# Altium PCB PCB1.PcbDoc
Units mil, origin at the board's own origin, x right, y up, seen from the top; angles counter-clockwise.
Board outline 3946.22 x 3225 mil, 2 copper layers (Top Layer, Bottom Layer); 38 components, 44 nets, 168 pads, 112 vias.
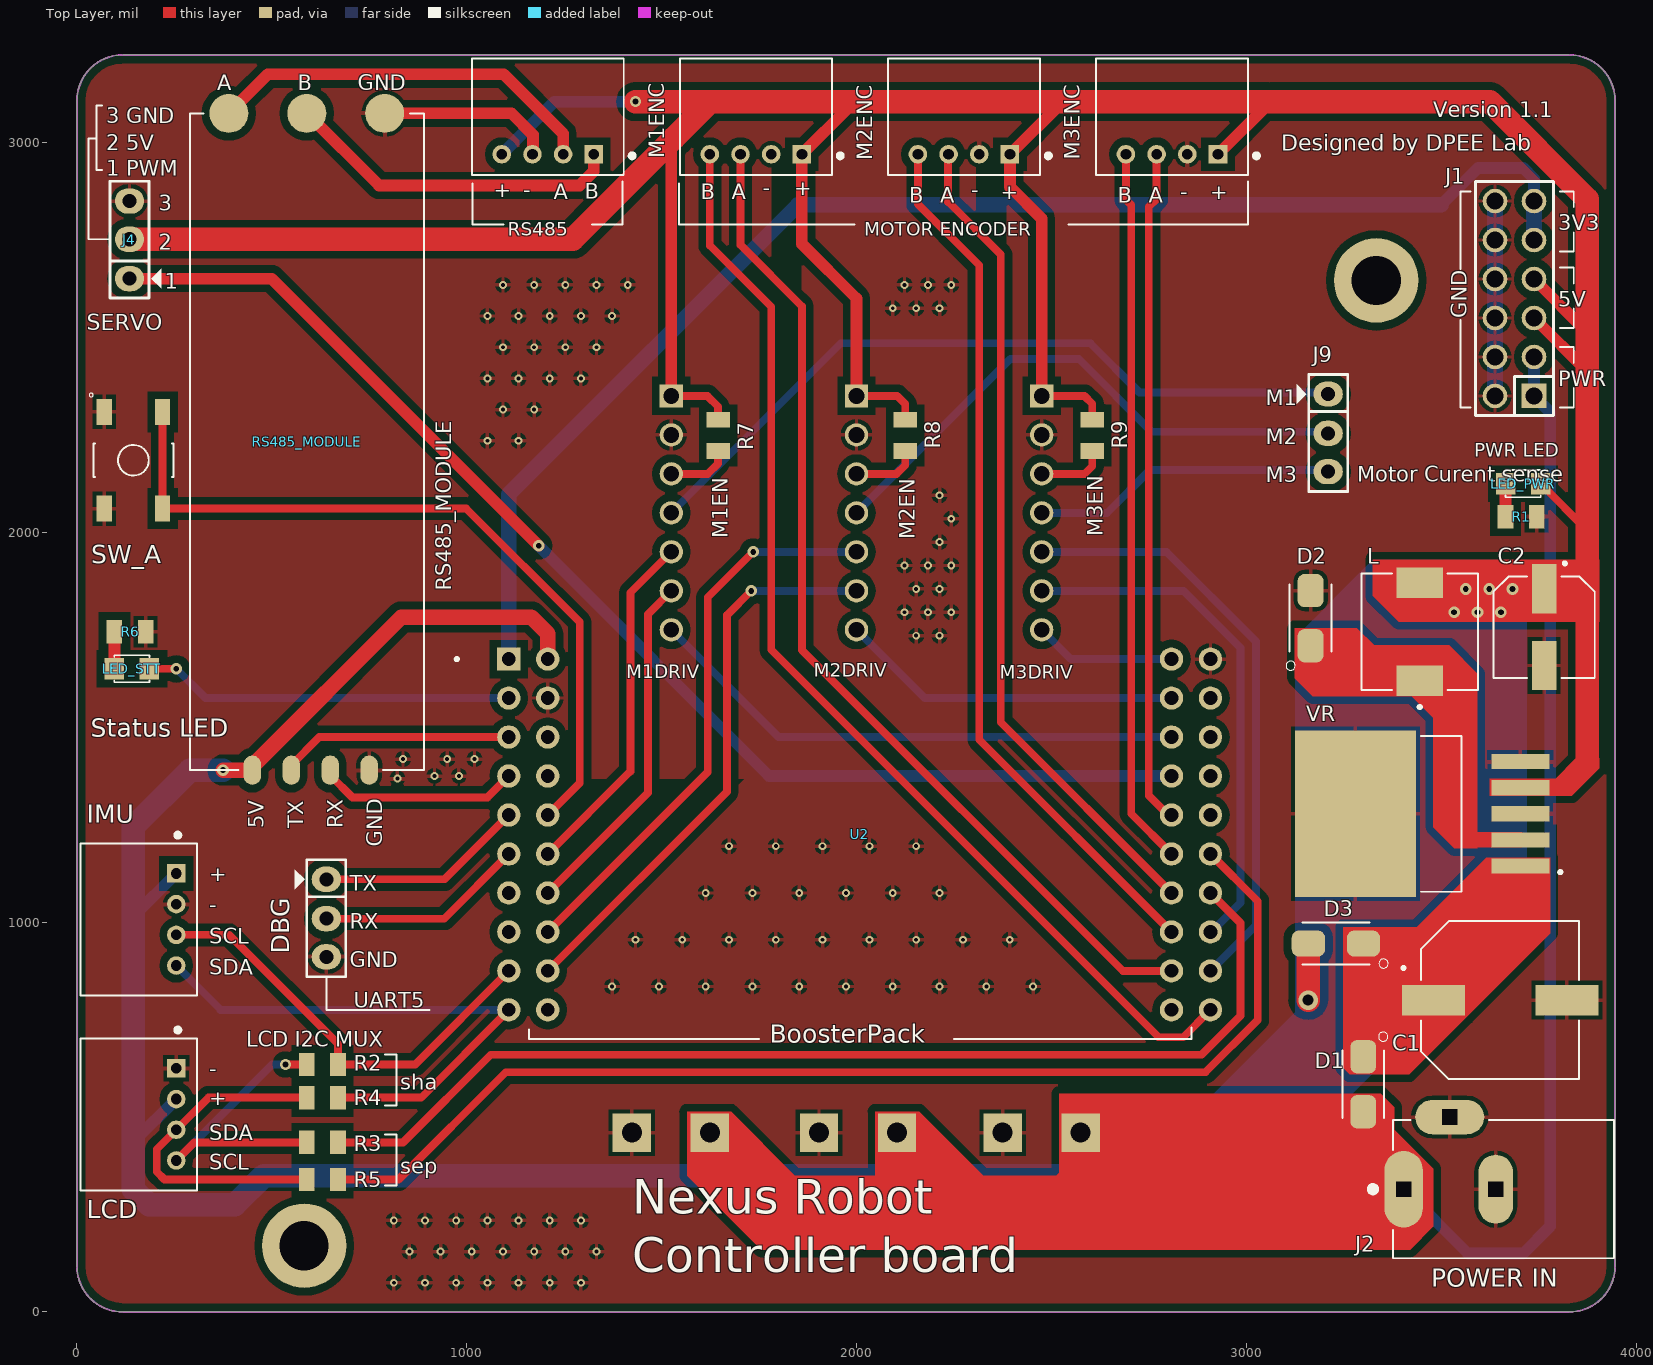
[diagram p0: Top Layer view]
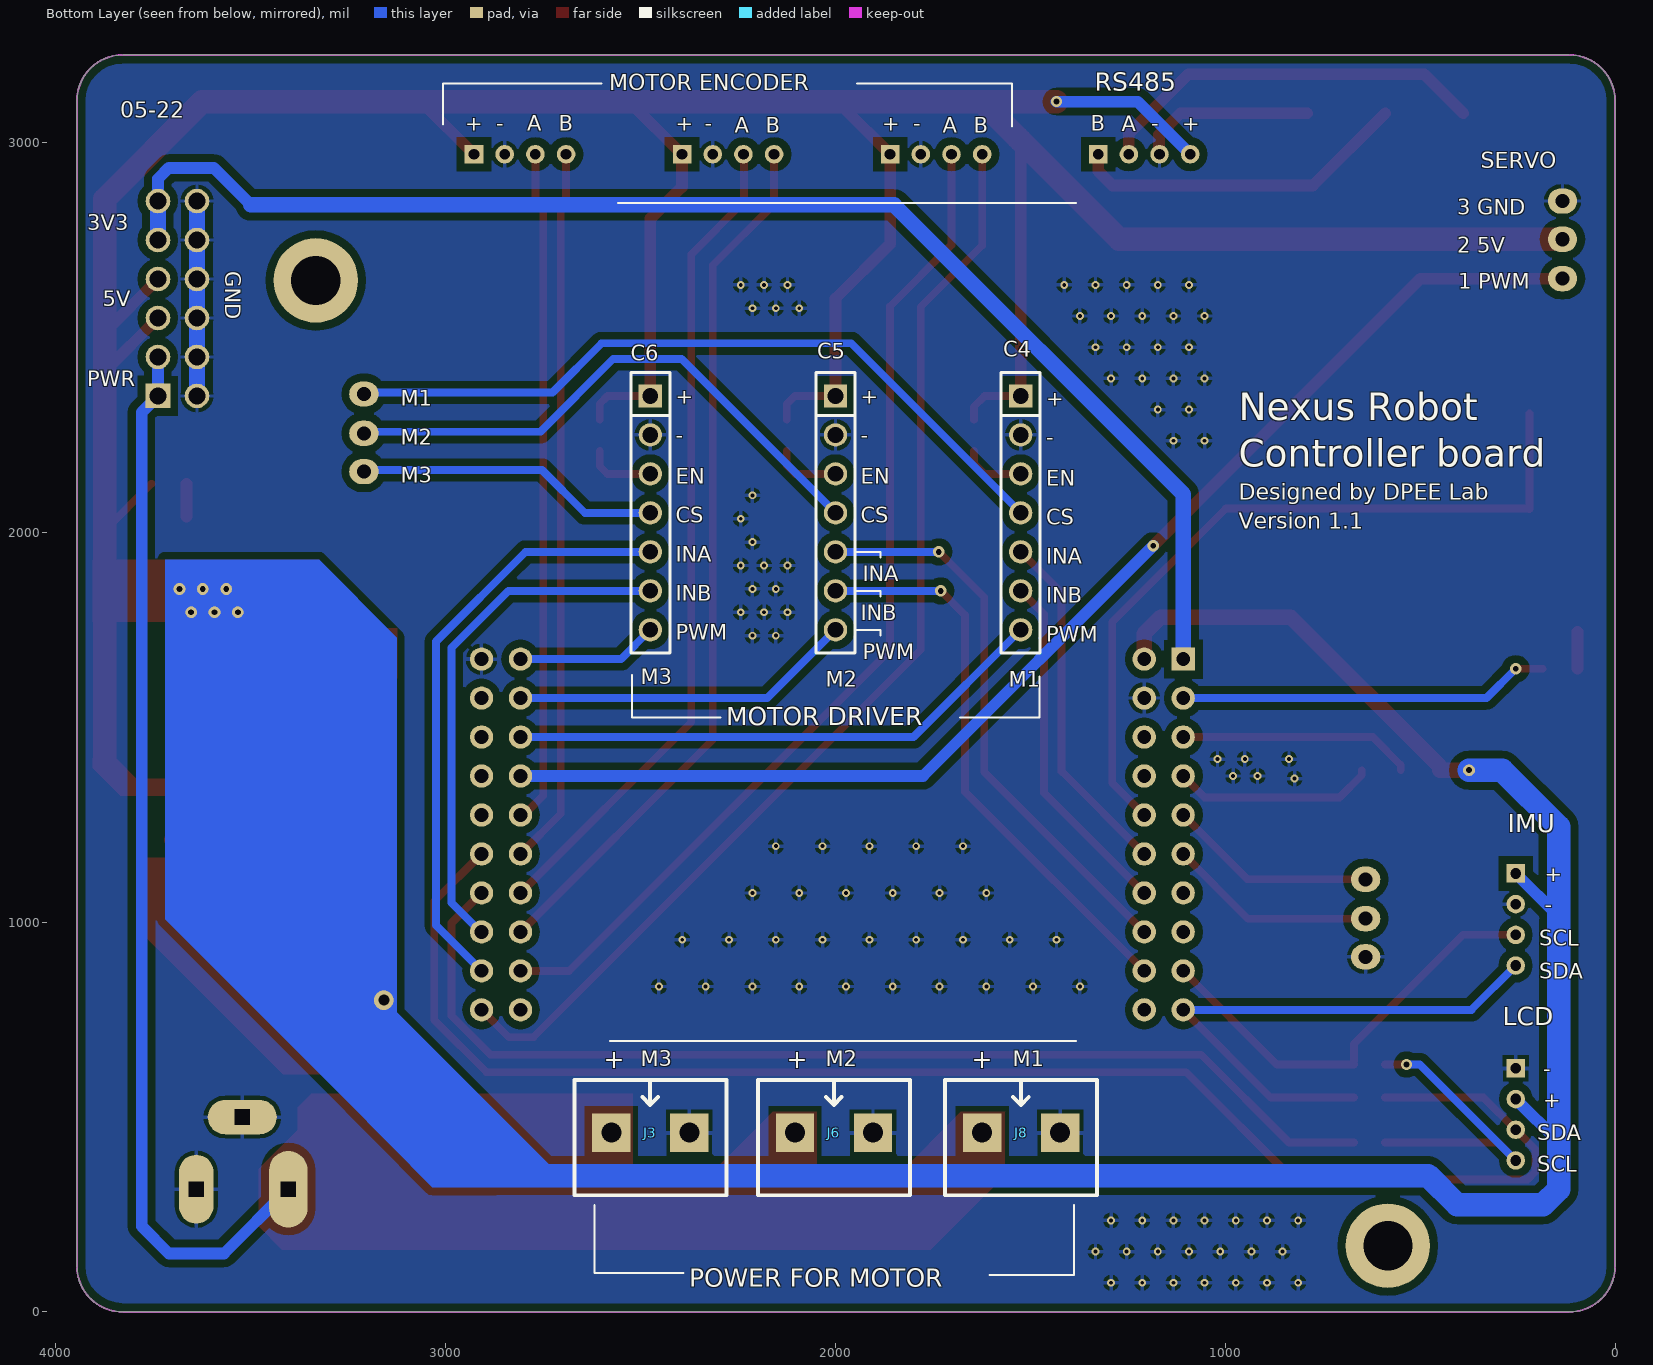
[diagram p1: Bottom Layer view, seen from below]
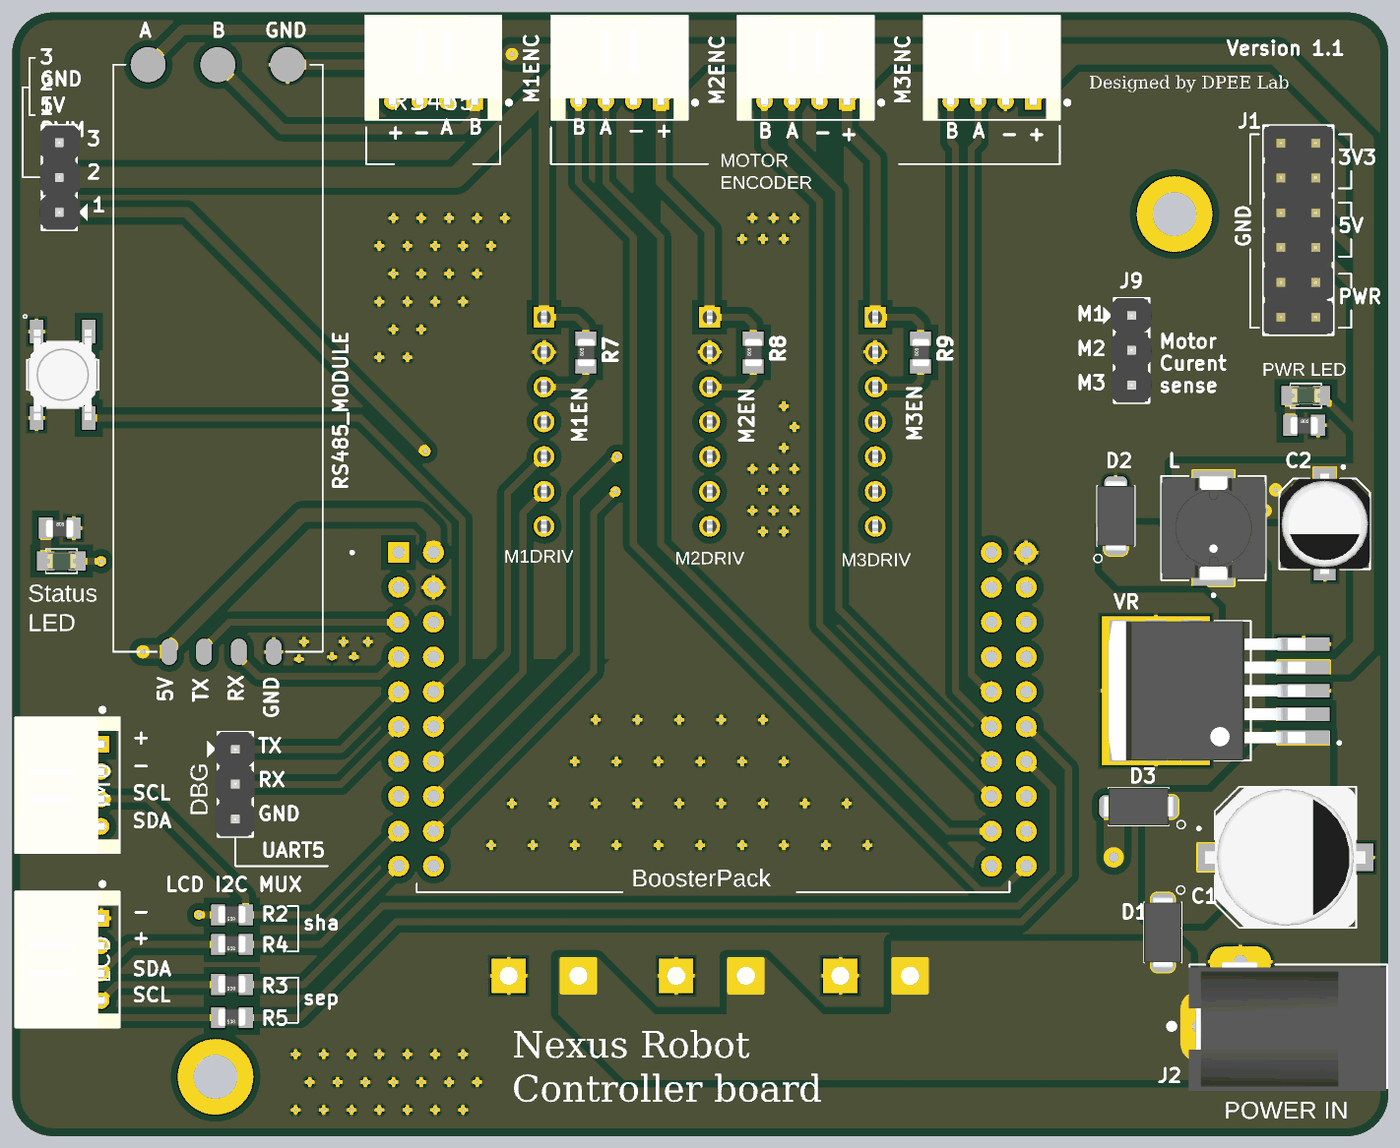
[diagram p2: 3D render of the assembled board from above, using the file's embedded part models]
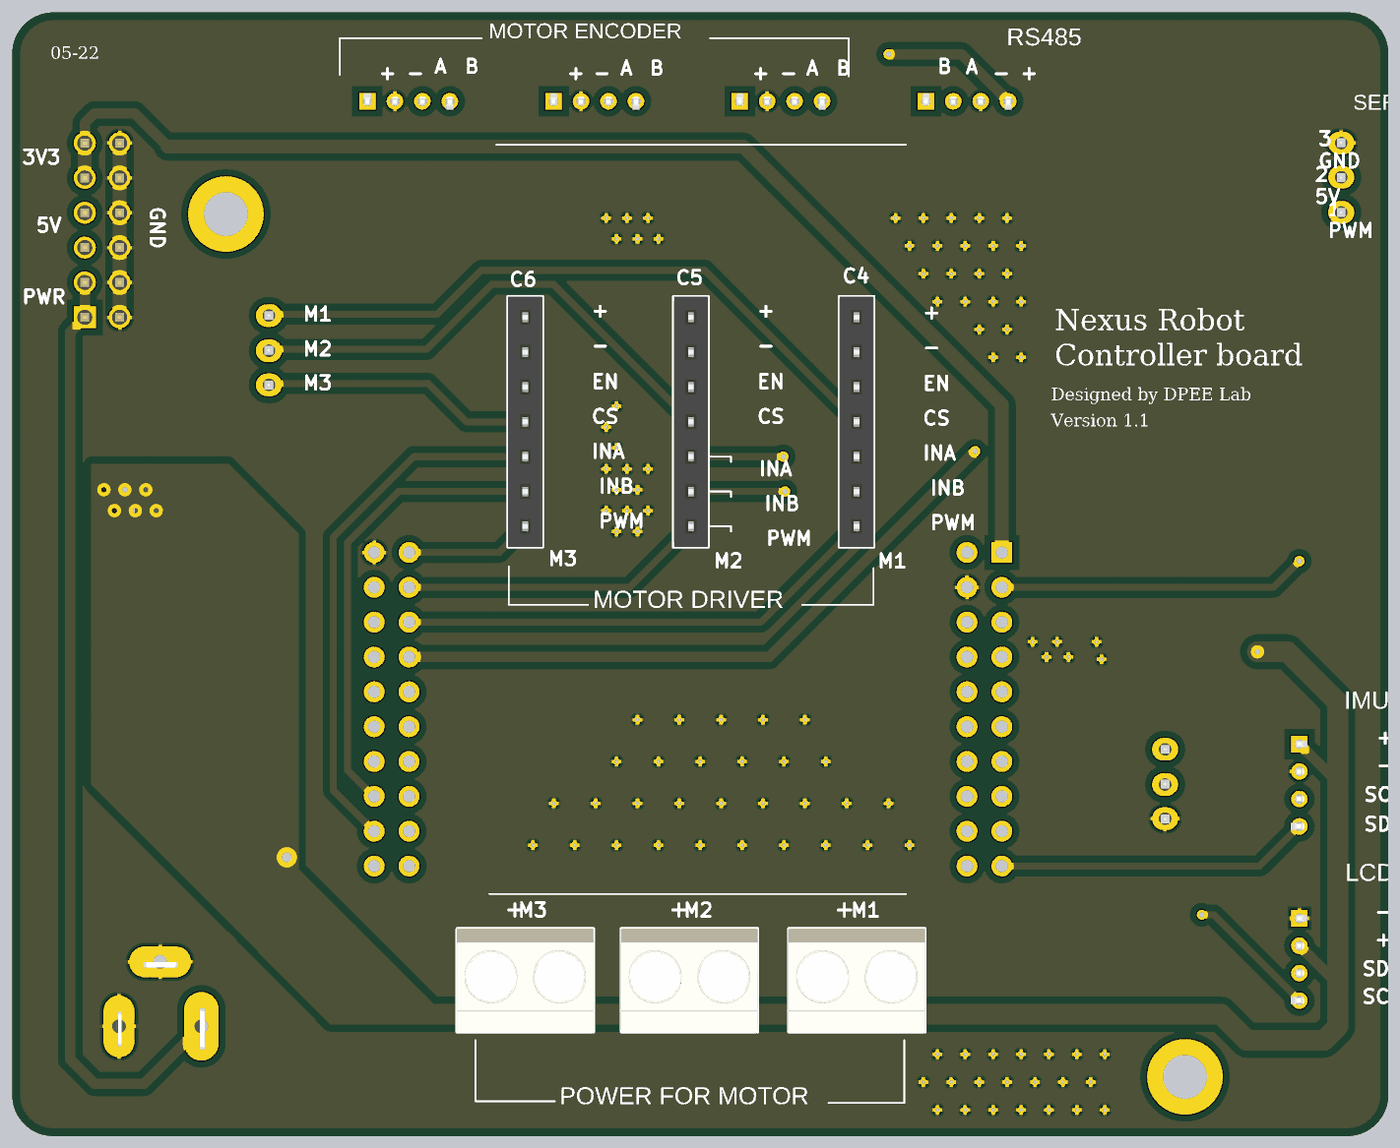
[diagram p3: 3D render of the assembled board from below, using the file's embedded part models]

## Layer stack, top to bottom
Top Solder: solder mask 0.4, Solder Resist, Dk 3.5
Top Layer: signal copper 1.4
Dielectric 1: dielectric 12.6, FR-4, Dk 4.8
Bottom Layer: signal copper 1.4
Bottom Solder: solder mask 0.4, Solder Resist, Dk 3.5

## Board outline
118.11,0 cw(c118.11,118.11) 0,118.11 0,3106.89 cw(c118.11,3106.89) 118.11,3225 3828.11,3225 cw(c3828.11,3106.89) 3946.22,3106.89 3946.22,118.11 cw(c3828.11,118.11) 3828.11,0

## Design rules (kind name [scope] priority, off if disabled: settings)
Clearance Clearance_Poly [InPolygon] p1: gap=20 ignorepadtopadclearanceinfootprint=FALSE
Clearance [All] p2: gap=8 ignorepadtopadclearanceinfootprint=FALSE
ComponentClearance ComponentClearance_1 [InComponent('u2') vs InComponent('c*', 'j*','r*')] p1: gap=0 collisioncheckmode=3 verticalgap=0 showdistances=FALSE
ComponentClearance [All] p2: gap=10 collisioncheckmode=3 verticalgap=0 showdistances=FALSE
MinimumSolderMaskSliver [All] p1: minsoldermaskwidth=7
PolygonConnect [All] p1: connectstyle=Relief reliefconductorwidth=10 reliefentries=4 polygonreliefangle="90 Angle" airgapwidth=10
RoutingVias [All] p1: holewidth=28 width=50 viastyle="Through Hole" minholewidth=10 minwidth=20 maxholewidth=15 maxwidth=30
SilkToSilkClearance [All] p1: silktosilkclearance=5
SilkToSolderMaskClearance [IsPad] p1: minsilkscreentomaskgap=5 clearancetoexposedcopper=TRUE
SolderMaskExpansion [All] p1: expansion=4
Width [All] p1: maxlimit=60 minlimit=10 preferedwidth=20
26 further rules are at their usual default settings.

## Components (designator, comment, footprint, x,y, rotation, side; value= is the part's Value field where it differs from the comment)
C1 "470uF" CAP_EEE2AA220P 3651.26,800 r0 top
C2 "220uF" CAP_EEEHB1V220P 3764.08,1756.92 r270 top
C4 "JP7" JP7-C1T 1525,2350 r270 bottom locked
C5 "JP7" JP7-C1T 2000,2350 r270 bottom locked
C6 "JP7" JP7-C1T 2475,2350 r270 bottom locked
D1 "EGF1B" DIOM449X264X300L114X135N 3300,584.33 r270 top
D2 "EGF1B" DIOM449X264X300L114X135N 3165,1780 r90 top
D3 "EGF1B" DIOM449X264X300L114X135N 3230,945 r180 top
DBG "Jumper 3" JP3 640,1010 r270 top value=J3
IMU "S4B-PH-K-S(LF)(SN)" JST_S4B-PH-K-S(LF)(SN) 255,1006.89 r270 top
J1 "JP6x2" JP6-D2T 3688.11,2600 r90 top
J2 "POWER IN" CUI_PJ-002B 3403.78,315 r0 top
J3 "M3" KF2-5.08 2475,460 r180 bottom locked
J4 "SERVO" JP3 135,2751 r90 top value=J3
J6 "M2" KF2-5.08 2003.9,460 r180 bottom locked
J8 "M1" KF2-5.08 1523.9,460 r180 bottom locked
J9 "Jumper 3" JP3 3210,2255 r270 top value=J3
L "330uH" IND_B1047AS-331M=P3 3445,1745 r90 top
LCD "S4B-PH-K-S(LF)(SN)" JST_S4B-PH-K-S(LF)(SN) 255,506.89 r270 top
LED_PWR "PWR LED" LED-0805-Green 3755,2125 r180 top value="LED 3 - 5 ly 2 Colour"
LED_STT "LED" LED-0805-Green 186.31,1650.26 r180 top value="LED 3 - 5 ly 2 Colour"
M1ENC "S4B-PH-K-S(LF)(SN)" JST_S4B-PH-K-S(LF)(SN) 1741.86,2970 r180 top
M2ENC "S4B-PH-K-S(LF)(SN)" JST_S4B-PH-K-S(LF)(SN) 2275.62,2970 r180 top
M3ENC "S4B-PH-K-S(LF)(SN)" JST_S4B-PH-K-S(LF)(SN) 2809.37,2970 r180 top
R1 "1k" SMD-0805-RES 3705,2040 r270 top value=0.2
R2 "0R" SMD-0805-RES 630,635 r90 top value=0.2
R3 "0R" SMD-0805-RES 630,435 r90 top value=0.2
R4 "0R" SMD-0805-RES 630,550 r90 top value=0.2
R5 "0R" SMD-0805-RES 630,340 r90 top value=0.2
R6 "1k" SMD-0805-RES 136.31,1745 r270 top value=0.2
R7 "1k" SMD-0805-RES 1645,2248.89 r0 top value=0.2
R8 "1k" SMD-0805-RES 2125,2248.89 r0 top value=0.2
R9 "1k" SMD-0805-RES 2605,2248.89 r0 top value=0.2
RS485 "S4B-PH-K-S(LF)(SN)" JST_S4B-PH-K-S(LF)(SN) 1208.11,2970 r180 top
RS485_MODULE "RS485_MODULE" RS485_MODULE 450,1389.96 r90 top
SW_A "TL3342F160QG" SW_TL3342F160QG 145,2185 r270 top
U2 "EK-TM4C123GXL" MODULE_EK-TM4C123GXL 2008.11,1575 r0 top locked
VR "LM2596S-5.0" TO170P1524X483-6N 3451.26,1278.11 r180 top

## Footprints (in the part's own frame and the unit in brackets; to place one, negate y for a bottom-side part, rotate by r counter-clockwise, add the part's x,y. Pads: shape width x height; smd on the part's side, far side on the other; paste and mask are expansions set on the pad)
CAP_EEE2AA220P [mm]
  rect 4.1x2 smd: 1(-4.35,0) 2(4.35,0)
  silkscreen extent -6.4,-5.15 5.15,5.15, body extent -5.85,-5.15 5.85,5.15, height 10.19
CAP_EEEHB1V220P [mm]
  rect 3.2x1.6 smd: 1(-2.5,0) 2(2.5,0)
  silkscreen extent -4.25,-3.3 3.3,3.3, body extent -3.65,-3.3 3.65,3.3, height 5.8
CUI_PJ-002B [mm]
  oval 2.5x5 hole 1 square: 1(0,0)
  oval 2.25x4.5 hole 1 square: 2(6,0)
  oval 4.5x2.25 hole 1 square: 3(3,4.7)
  silkscreen extent -2.2,-4.5 13.7,4.5, body extent -0.76,-4.7 13.64,4.7, height 10.98
DIOM449X264X300L114X135N [mm]
  rrect54% 2.17x1.69 smd: A(1.795,0) C(-1.795,0)
  silkscreen extent -3.4,-1.36 2.19,1.6, body extent -2.6,-1.36 2.6,1.36, height 2.65
IND_B1047AS-331M=P3 [mm]
  rect 2x3 smd: 1(-3.2,0) 2(3.2,0)
  silkscreen extent -5,-3.8 3.8,3.8, body extent -3.8,-3.8 3.8,3.8, height 5
JP3 [mil] "Jumper 3"
  oval 65x75 hole 36: 1(-100,0) 2(1,0) 3(99,0)
  silkscreen extent -150,-81 150,50, body extent -150,-60 150,55, height 355
JP6-D2T [mm] "12 pins, dual pin, straight, gold plating"
  rect 1.6x1.6 hole 1.1: 1(-6.35,-1.27)
  round 1.6 hole 1.1: 2(-3.81,-1.27) 3(-1.27,-1.27) 4(1.27,-1.27) 5(3.81,-1.27) 6(6.35,-1.27) 7(6.35,1.27) 8(3.81,1.27) 9(1.27,1.27) 10(-1.27,1.27) 11(-3.81,1.27) 12(-6.35,1.27)
  silkscreen extent -7.62,-2.54 7.62,2.54, body extent -7.62,-2.54 7.62,2.54, height 8.55
JP7-C1T [mm] "7 row, straight, gold plating"
  rect 1.52x1.52 hole 1.02: 1(0,0)
  round 1.52 hole 1.02: 2(2.54,0) 3(5.08,0) 4(7.62,0) 5(10.16,0) 6(12.7,0) 7(15.24,0)
  silkscreen extent -1.52,-1.27 16.76,1.27, body extent -1.52,-1.25 16.76,1.25, height 8.51
JST_S4B-PH-K-S(LF)(SN) [mm]
  rect 1.208x1.208 hole 0.7: 1(-3,0)
  round 1.208 hole 0.7: 2(-1,0) 3(1,0) 4(3,0)
  silkscreen extent -5.64,-6.25 4.95,1.35, body extent -4.95,-6.22 4.95,1.38, height 4.8
KF2-5.08 [mm]
  rect 2.5x2.5 hole 1.3: 1(-2.54,0) 2(2.54,0)
  silkscreen extent -4.95,-4.08 4.95,3.43, body extent -5,-4.07 5,3.43, height 10
LED-0805-Green [mil]
  rect 50x55 smd: 1(0,0) 2(90,0)
  silkscreen extent 0,-35 90,35, body extent 5,-25 85,25, height 43
MODULE_EK-TM4C123GXL [mm]
  rect 1.52x1.52 hole 0.89: J1_1(-22.86,2.54)
  round 1.52 hole 0.89: J1_2(-22.86,0) J1_3(-22.86,-2.54) J1_4(-22.86,-5.08) J1_5(-22.86,-7.62) J1_6(-22.86,-10.16) J1_7(-22.86,-12.7) J1_8(-22.86,-15.24) J1_9(-22.86,-17.78) J1_10(-22.86,-20.32) J2_1(22.86,2.54) J2_2(22.86,0) J2_3(22.86,-2.54) J2_4(22.86,-5.08) J2_5(22.86,-7.62) J2_6(22.86,-10.16) J2_7(22.86,-12.7) J2_8(22.86,-15.24) J2_9(22.86,-17.78) J2_10(22.86,-20.32) J3_1(-20.32,2.54) J3_2(-20.32,0) J3_3(-20.32,-2.54) J3_4(-20.32,-5.08) J3_5(-20.32,-7.62) J3_6(-20.32,-10.16) J3_7(-20.32,-12.7) J3_8(-20.32,-15.24) J3_9(-20.32,-17.78) J3_10(-20.32,-20.32) J4_1(20.32,2.54) J4_2(20.32,0) J4_3(20.32,-2.54) J4_4(20.32,-5.08) J4_5(20.32,-7.62) J4_6(20.32,-10.16) J4_7(20.32,-12.7) J4_8(20.32,-15.24) J4_9(20.32,-17.78) J4_10(20.32,-20.32)
  silkscreen extent -26.35,2.44 -26.15,2.64
RS485_MODULE [mm]
  oval 1.905x1.143 smd: 1(0,0) 2(0,-2.54) 3(0,-5.08) 4(0,-7.62)
  round 2.54 smd: 5(42.8,1.53) 6(42.8,-3.55) 7(42.8,-8.63)
  silkscreen extent 0,-11.18 42.8,4.05, body extent 0,-11.18 42.8,4.06, height 1.4
SMD-0805-RES [mil]
  rect 60x40 smd: 1(0,40) 2(0,-40)
  body extent -24,-39 26,39, height 31
SW_TL3342F160QG [mm]
  rect 1.7x1 smd: 1(-3.15,-1.9) 2(3.15,-1.9) 3(-3.15,1.9) 4(3.15,1.9)
  silkscreen extent -4.38,-2.88 1.1,2.6, body extent -3.3,-2.5 3.3,2.5, height 1.46
TO170P1524X483-6N [mm]
  rect 3.79x0.99 smd: 1(-6.4,3.4) 2(-6.4,1.7) 3(-6.4,0) 4(-6.4,-1.7) 5(-6.4,-3.4)
  rect 7.88x10.84 smd paste-6: 6(4.35,0)
  silkscreen extent -9.1,-5.08 0.09,5.08, body extent -6.54,-5.08 7.81,5.08, height 4.65

## Part data
C1: library part EEE2AA220P, "Capacitor; Alum Electrolytic; Cap 22 uF; Tol 20%; Vol-Rtg 100 VDC; SMT; 10x10.5; TR", Package="RADIAL-2 Panasonic", Availability="In Stock", Check_prices=https://www.snapeda.com/parts/EEE-2AA220P/Panasonic/view-part/865126/?ref=eda, MF=Panasonic, MP=EEE-2AA220P, Price=None, SnapEDA_Link=https://www.snapeda.com/parts/EEE-2AA220P/Panasonic/view-part/865126/?ref=snap
C2: library part EEEHB1V220P, "EEE-HB Series 35 V 22 uF Ø 6.3 x 5.8 mm 105 °C SMT V-Chip Aluminum Electrolytic", Package="RADIAL-2 Panasonic", Availability="In Stock", Check_prices=https://www.snapeda.com/parts/EEEHB1V220P/Panasonic/view-part/?ref=eda, MF=Panasonic, MP=EEEHB1V220P, Price=None, Purchase-URL=https://pricing.snapeda.com/search/part/EEEHB1V220P/?ref=eda, SnapEDA_Link=https://www.snapeda.com/parts/EEEHB1V220P/Panasonic/view-part/?ref=snap
C4 C5 C6: library part JP7_1, "WR-PHD 2.54 mm Angled Socket Header", Manufacturer="W¨¹rth Elektronik eiSos GmbH", partNo=613007143121, ComponentLink1 Description=Manufacturer, ComponentLink1URL=http://www.we-online.com, ComponentLink2 Description=Datasheet, ComponentLink2URL=http://katalog.we-online.de/em/datasheet/6130xx143121.pdf, Created by="Karrer Zheng", Created Date="29 March 2013", NoPins=07
D1 D2 D3: "SS54 SMA / Diode Shotky SS54 1N5824 5A 40V", Package="DO-214AC-214 ON Semiconductor", Availability=Unavailable, MF="ON Semiconductor", MP=EGF1B, Price=None, SnapEDA_Link=https://www.snapeda.com/parts/EGF1B/ON%20Semiconductor/view-part/1790489/?ref=snap
DBG J4 J9: library part JP3
IMU LCD M1ENC M2ENC M3ENC RS485: "Connector Header Through Hole, Right Angle 4 position 0.079 _2.00mm_", Package=None, Availability=Unavailable, MF="JST Sales", MP=S4B-PH-K-S_LF__SN_, Price=None, SnapEDA_Link=https://www.snapeda.com/parts/S4B-PH-K-S%28LF%29%28SN%29/JST%20Sales%20America%20Inc./view-part/591324/?ref=snap
J1: "WR-PHD 2.54 mm Dual Socket Header", Manufacturer="W¨¹rth Elektronik eiSos GmbH", partNo=61301221821, ComponentLink1 Description=Manufacturer, ComponentLink1URL=http://www.we-online.com, ComponentLink2 Description=Datasheet, ComponentLink2URL=http://katalog.we-online.de/em/datasheet/6130xx21821.pdf, Created by="Karrer Zheng", Created Date="29 March 2013", NoPins=12
J2: library part PJ-002B, "2.5 x 6.5 mm, 2.5 A, Horizontal, Through Hole, Dc Power Jack Connector", Package=None, Availability=Unavailable, CUI_purchase_URL=https://www.cuidevices.com/product/interconnect/connectors/dc-power-connectors/jacks/pj-002b?utm_source=snapeda.com&utm_medium=referral&utm_campaign=snapedaBOM, MF="CUI Devices", MP=PJ-002B, Price=None, SnapEDA_Link=https://www.snapeda.com/parts/PJ-002B/CUI%20Devices/view-part/697203/?ref=snap
J3 J6 J8: library part KF2, Manufacturer="Würth Elektronik eiSos GmbH", partNo=691103110002, ComponentLink1 Description=Manufacturer, ComponentLink1URL=http://www.we-online.com, ComponentLink2 Description=Datasheet, ComponentLink2URL=http://katalog.we-online.de/em/datasheet/6911031100xx.pdf, Created by="Karrer Zheng", Created Date="29 October 2013", NoPins=2
L: library part B1047AS-331M=P3, "Inductor with Inductance: 330uH Tol. +/-20%, Package: 2929 (7373)", Package=NONSTANDARD, Arrow_Electronics-Purchase-URL=https://snapeda.com/shop?store=Arrow+Electronics&id=1412841, Availability=Unavailable, MF=Murata, Mouser-Purchase-URL=https://snapeda.com/shop?store=Mouser&id=1412841, MP=B1047AS-331M=P3, Price=None, SnapEDA_Link=https://www.snapeda.com/parts/B1047AS-331M=P3/Murata/view-part/1412841/?ref=snap
LED_PWR LED_STT: library part "LED SMD"
R1 R2 R3 R4 R5 R6 R7 R8 R9: library part "Res SMD 0805", "RES SMD 0805", Digi-Key Part Number=P.2BKCT-ND, Manufacturer="Panasonic Electronic Components", Operating Temperature="-55°C ~ 155°C", Package / Case="0805 (2012 Metric)", Part Number=ERJ-S6SJR20V, Power (Watts)="0.25W, 1/4W", Supplier Device Package=0805, Temperature Coefficient=±150ppm/°C, Tolerance=±5%, @ qty=1500, Composition="Thick Film", Datasheets=https://industrial.panasonic.com/cdbs/www-data/pdf/RDA0000/AOA0000CE5.pdf, Factory Stock=0, Failure Rate=-, Features="Anti-Sulfur, Automotive AEC-Q200", Height - Seated (Max)="0.026\" (0.65mm)", Image=//media.digikey.com/Renders/Panasonic%20Renders/ERJ-0805%20Pkg.jpg, Minimum Quantity=1, Number of Terminations=2, Packaging="Cut Tape (CT)", Part Status=Active, Quantity Available=14281, Series=ERJ, Size / Dimension="0.079\" L x 0.049\" W (2.00mm x 1.25mm)", Unit Price (USD)=0.07603
SW_A: "Tactile Switch SPST-NO Top Actuated Surface Mount", Package=None, Availability=Unavailable, MF=E-Switch, MP=TL3342F160QG, Price=None, SnapEDA_Link=https://www.snapeda.com/parts/TL3342F160QG/E-Switch/view-part/1099729/?ref=snap
U2: "ARM® Cortex®-M4F Based MCU TM4C123G LaunchPad™ Evaluation Kit", Package=None, Availability=Warning, Check_prices=https://www.snapeda.com/parts/EK-TM4C123GXL/Texas%20Instruments/view-part/132968/?ref=eda, MF="Texas Instruments", MP=EK-TM4C123GXL, Price=None, Purchase-URL=https://pricing.snapeda.com/search/part/EK-TM4C123GXL/?ref=eda, SnapEDA_Link=https://www.snapeda.com/parts/EK-TM4C123GXL/Texas%20Instruments/view-part/132968/?ref=snap
VR: "SIMPLE SWITCHER&reg; 4.5V to 40V, 3A Low Component Count Step-Down Regulator 5-DDPAK/TO-263", Package="TO-263-5 Texas Instruments", Availability=Good, DigiKey-Purchase-URL=https://snapeda.com/shop?store=DigiKey&id=15588, MF="Texas Instruments", Mouser-Purchase-URL=https://snapeda.com/shop?store=Mouser&id=15588, MP=LM2596S-5.0/NOPB, Price=None, SnapEDA_Link=https://www.snapeda.com/parts/LM2596S-5.0/NOPB/Texas%20Instruments/view-part/15588/?ref=snap, Texas_Instruments-Purchase-URL=https://snapeda.com/shop?store=Texas+Instruments&id=15588

## Free pads (board coordinates)
  round 216.54 hole 125.98 unplated: 8(583.11,170) 9(3333.35,2646.3)

## Via types
v1: diameter 20, hole 10, Top Layer to Bottom Layer, 98 vias
v2: diameter 30, hole 15, Top Layer to Bottom Layer, 11 vias
v3: diameter 28, hole 15, Top Layer to Bottom Layer, 2 vias
v4: diameter 50, hole 28, Top Layer to Bottom Layer, 1 vias

## Nets (pads, with @x,y where several pads share a name; then routed paths per layer and width w, separated by ;. In a path a pad name is that pad's centre, name@x,y a point inside that pad or via, vN(x,y) a via of type N, cw(c..) or ccw(c..) an arc to the next point about the centre after c; other vN are vias at no path point)
3V3: J1.5 J1.6 U2.J1_1 | length 3568.3
  Bottom Layer w30: 3500,2840 3595,2935 3710,2935 3738.11,2906.89 J1.6
  Bottom Layer w40: U2.J1_1 1108.11,2098.11 1850,2840 3500,2840 ; J1.5 J1.6
5V: C2.1 C4.1 C5.1 C6.1 D3.A IMU.1 J1.3 J1.4 J4.2 L.2 LCD.2 LED_PWR.1 M1ENC.1 M2ENC.1 M3ENC.1 R7.1 R8.1 R9.1 RS485.4 RS485_MODULE.1 U2.J3_1 VR.4 | length 16935.3
  Top Layer w20: C4.1 1617.44,2350 1645,2322.44 R7.1 ; C5.1 2104.23,2350 2125,2329.23 R8.1 ; C6.1 2585,2350 2605,2330 R9.1 ; LED_PWR.1 3875,2005
  Top Layer w30: C4.1 1525,3005 1532.5,3012.5 ; 1980,3105 1980,3090.03 M1ENC.1 1859.97,2740.03 2000,2600 C5.1 ; C6.1 2475,2805 2393.73,2886.27 M2ENC.1 2528.73,3105 2530,3105 ; M3ENC.1 3062.48,3105 ; J1.3 3875,2413.11 ; J1.4 3875,2513.11
  Top Layer w40: v2(375,1390) RS485_MODULE.1 450,1400 832.75,1782.75 1165.75,1782.75 1208.11,1740.39 U2.J3_1 ; 3875,2390 3875,2413.11 ; 3875,2510 3875,2513.11
  Top Layer w60: J4.2 1272,2752 1525,3005 ; v3(1433.11,3105) 1625,3105 ; 1532.5,3012.5 1625,3105 ; 2528.73,3105 1980,3105 1625,3105 ; 2530,3105 2825,3105 3055,3105 ; 3062.48,3105 3440,3105 3625,3105 3875,2855 3875,2513.11 ; v4(3158.66,800) 3159.33,800.67 D3.A ; 3875,1410.6 3875,2005 3875,2390 ; 3875,2413.11 3875,2510
  Bottom Layer w30: 145,435 145,436.26 LCD.2 ; 145,1005 145,1015 IMU.1 ; RS485.4 1225,3105 v3(1433.11,3105)
  Bottom Layer w60: 145,435 145,315 185,275 405,275 480,350 2870,350 3158.66,638.66 v4(3158.66,800) 3158.66,1418.4 3560,1819.74 ; 145,436.26 145,1005 ; 145,1015 145,1245 290,1390 v2(375,1390)
  other v2: 3533.11,1795 3593.11,1795 3653.11,1795 3563.11,1855 3623.11,1855 3683.11,1855
buck_in: C1.1 D1.C D3.C VR.1 | length 469.6
  Top Layer w60: D1.C 3300.67,655.67 3300.67,800 ; D3.C 3300.67,800 ; C1.1 3300.67,800
buck_out: D2.C L.1 VR.2 | length 916.7
  Top Layer w40: D2.C 3255.31,1619.02 L.1 3470.98,1619.02 3535,1555 3535,1261.18 3585,1211.18 VR.2
DBG_RX: DBG.1 U2.J1_5 | length 536.5
  Top Layer w20: DBG.1 943.11,1110 U2.J1_5
DBG_TX: DBG.2 U2.J1_6 | length 536.9
  Top Layer w20: DBG.2 942.11,1009 U2.J1_6
GND: C1.2 C2.2 C4.2 C5.2 C6.2 D2.A DBG.3 IMU.2 J1.7 J1.8 J1.9 J1.10 J1.11 J1.12 J2.2 J2.3 J3.2 J4.3 J6.2 J8.2 LCD.1 M1ENC.2 M2ENC.2 M3ENC.2 R1.1 R6.1 RS485.3 RS485_MODULE.4 RS485_MODULE.7 SW_A.1 SW_A.2 U2.J2_1 U2.J3_2 VR.3 VR.5 VR.6 | length 953.5
  Top Layer w30: RS485_MODULE.7 1115,3075 1170,3020 1170,2971.26 RS485.3
  Bottom Layer w40: J1.12 J1.11 J1.10 J1.9 J1.8 J1.7
  other v1: 813.11,75 893.11,75 973.11,75 1053.11,75 1133.11,75 1213.11,75 1293.11,75 853.11,155 933.11,155 1013.11,155 1093.11,155 1173.11,155 1253.11,155 1333.11,155 813.11,235 893.11,235 973.11,235 1053.11,235 1133.11,235 1213.11,235 1293.11,235 1373.11,835 1493.11,835 1613.11,835 1733.11,835 1853.11,835 1973.11,835 2093.11,835 2213.11,835 2333.11,835 2453.11,835 1433.11,955 1553.11,955 1673.11,955 1793.11,955 1913.11,955 2033.11,955 2153.11,955 2273.11,955 2393.11,955 1613.11,1075 1733.11,1075 1853.11,1075 1973.11,1075 2093.11,1075 2213.11,1075 1673.11,1195 1793.11,1195 1913.11,1195 2033.11,1195 2153.11,1195 822.35,1368.32 917.35,1375 980,1375 836.67,1418.49 949.94,1418.49 1020,1418.49 2153.11,1735 2213.11,1735 2123.11,1795 2183.11,1795 2243.11,1795 2153.11,1855 2213.11,1855 2123.11,1915 2183.11,1915 2243.11,1915 2213.11,1975 2243.11,2035 2213.11,2095 1053.11,2235 1133.11,2235 1093.11,2315 1173.11,2315 1053.11,2395 1133.11,2395 1213.11,2395 1293.11,2395 1093.11,2475 1173.11,2475 1253.11,2475 1333.11,2475 1053.11,2555 1133.11,2555 1213.11,2555 1293.11,2555 1373.11,2555 2093.11,2575 2153.11,2575 2213.11,2575 1093.11,2635 1173.11,2635 1253.11,2635 1333.11,2635 1413.11,2635 2123.11,2635 2183.11,2635 2243.11,2635
IMU_SCL: IMU.3 R2.2 U2.J1_9 | length 1112.5
  Top Layer w20: IMU.3 390.41,967.52 670,687.93 R2.2@670,643.74 ; R2.2 868.11,635 U2.J1_9
IMU_SDA: IMU.4 R4.2 U2.J1_10 | length 1441
  Top Layer w20: R4.2 883.11,550 U2.J1_10@1104.76,771.65 ; U2.J1_10@1101.41,775 U2.J1_10@1104.76,771.65 ; U2.J1_10@1108.11,768.3 U2.J1_10@1104.76,771.65 ; U2.J1_10 U2.J1_10@1104.76,771.65
  Bottom Layer w20: IMU.4 368.78,775 403.1,775 U2.J1_10
LCD_SCL: LCD.4 R2.1 R3.1 | length 791.1
  Top Layer w20: LCD.4 301.22,435 R3.1 ; v3(535,635) R2.1
  Bottom Layer w20: LCD.4 501.22,635 v3(535,635)
LCD_SCL_MUX: R3.2 U2.J2_7 | length 2796.5
  Top Layer w20: R3.2 836.67,435 1061.67,660 2885,660 2985,760 2985,998.11 U2.J2_7
LCD_SDA: LCD.3 R4.1 R5.1 | length 890.7
  Top Layer w20: R5.1 225,340 205,360 205,417.52 LCD.3 337.48,550 R4.1
LCD_SDA_MUX: R5.2 U2.J2_6 | length 3004.6
  Top Layer w20: R5.2 825,340 1100,615 2895,615 3029.16,749.16 3029.16,1053.95 U2.J2_6
LED_STT: LED_STT.1 U2.J1_2 | length 953
  Top Layer w20: LED_STT.1 186.57,1650 v2(255,1650)
  Bottom Layer w20: v2(255,1650) 330,1575 U2.J1_2
M1_CS: C4.4 J9.1 | length 1917.4
  Bottom Layer w20: C4.4 1960,2485 2600,2485 2726,2359 J9.1@3210,2359
M1_EN: C4.3 R7.2 | length 163.4
  Top Layer w20: C4.3 1618.47,2150 1645,2176.53 R7.2
M1_ENC_A: M1ENC.3 U2.J4_9 | length 2626
  Top Layer w20: M1ENC.3 1702.49,2737.51 1859.97,2580.03 1859.97,1698.39 2683.36,875 U2.J4_9
M1_ENC_B: M1ENC.4 U2.J2_10 | length 2904
  Top Layer w20: M1ENC.4 1623.75,2736.25 1781.23,2578.77 1781.23,1698.77 2775,705 2838.11,705 U2.J2_10
M1_INA: C4.5 U2.J3_6 | length 906.3
  Top Layer w20: U2.J3_6 1420,1386.89 1420,1845 C4.5
M1_INB: C4.6 U2.J3_7 | length 906.3
  Top Layer w20: U2.J3_7 1465,1331.89 1465,1790 C4.6
M1_PWM: C4.7 U2.J4_3 | length 1397
  Bottom Layer w20: C4.7 1800,1475 U2.J4_3
M2_CS: C5.4 J9.2 | length 1451.1
  Bottom Layer w20: C5.4 2395,2445 2570,2445 2757,2258 J9.2@3210,2258
M2_EN: C5.3 R8.2 | length 170.9
  Top Layer w20: C5.3 2102.76,2150 2125,2172.24 R8.2
M2_ENC_A: M2ENC.3 U2.J4_7 | length 2132.8
  Top Layer w20: M2ENC.3 2235.11,2968.86 2235.11,2847.83 2370,2712.93 2370,1513.11 U2.J4_7
M2_ENC_B: M2ENC.4 U2.J4_8 | length 2264.5
  Top Layer w20: M2ENC.4 2157.51,2842.49 2315,2685 2315,1468.11 U2.J4_8
M2_INA: C5.5 U2.J3_8 | length 1458.2
  Top Layer w20: U2.J3_8 1618.47,1385.36 1618.47,1833.47 v2(1735,1950)
  Bottom Layer w20: v2(1735,1950) C5.5
M2_INB: C5.6 U2.J3_9 | length 1461.2
  Top Layer w20: U2.J3_9 1667.71,1334.6 1667.71,1787.71 v2(1730,1850)
  Bottom Layer w20: v2(1730,1850) C5.6
M2_PWM: C5.7 U2.J4_2 | length 880.6
  Bottom Layer w20: C5.7 2175,1575 U2.J4_2
M3_CS: C6.4 J9.3 | length 780.6
  Bottom Layer w20: C6.4 2642.96,2050 2752.96,2160 J9.3@3210,2160
M3_EN: C6.3 R9.2 | length 177.3
  Top Layer w20: C6.3 2585.26,2150 2605,2169.74 R9.2
M3_ENC_A: M3ENC.3 U2.J4_5 | length 1732.1
  Top Layer w20: M3ENC.3 2770,2855 2750,2835 2750,1325 2800,1275 U2.J4_5
M3_ENC_B: M3ENC.4 U2.J4_6 | length 1843.4
  Top Layer w20: M3ENC.4 2691.26,2853.74 2705,2840 2705,1278.11 U2.J4_6
M3_INA: C6.5 U2.J2_9 | length 1538.7
  Bottom Layer w20: C6.5 2795,1950 3025,1720 3025,991.89 U2.J2_9
M3_INB: C6.6 U2.J2_8 | length 1332.4
  Bottom Layer w20: C6.6 2838.89,1850 2985,1703.89 2985,1050 2910,975 U2.J2_8
M3_PWM: C6.7 U2.J4_1 | length 364.2
  Bottom Layer w20: C6.7 2550,1675 U2.J4_1
NetLED_PWR_2: LED_PWR.2 R1.2 | length 85
  Top Layer w30: R1.2 LED_PWR.2
NetLED_STT_2: LED_STT.2 R6.2 | length 94.7
  Top Layer w30: LED_STT.2 R6.2
RS485_A: RS485.2 RS485_MODULE.5 | length 1014.7
  Top Layer w30: RS485_MODULE.5@389.88,3074.88 490,3175 1095,3175 1247.48,3022.52 RS485.2
RS485_B: RS485.1 RS485_MODULE.6 | length 871.8
  Top Layer w30: RS485_MODULE.6@589.88,3075.12 775,2890 1290,2890 1326.22,2926.22 RS485.1
RS485_RX: RS485_MODULE.3 U2.J1_4 | length 517.5
  Top Layer w20: RS485_MODULE.3 650,1376.91 706.91,1320 1053.11,1320 U2.J1_4
RS485_TX: RS485_MODULE.2 U2.J1_3 | length 601
  Top Layer w20: RS485_MODULE.2 550,1403.01 621.99,1475 U2.J1_3
SERVO_PWM: J4.1 U2.J4_4 | length 3201.6
  Top Layer w30: J4.1 499.63,2651 v2(1185,1965.63)
  Bottom Layer w30: v2(1185,1965.63) 1775.63,1375 U2.J4_4
SW_A: SW_A.3 SW_A.4 U2.J3_5 | length 1964.6
  Top Layer w20: SW_A.4@219.61,2060 SW_A.3@219.61,2305 ; SW_A.4 999.02,2060.98 1290,1770 1290,1356.89 U2.J3_5
VPOWER: D1.A J1.1 J1.2 J2.1 J3.1 J6.1 J8.1 | length 5122.6
  Top Layer w60: J8.1@1628.59,464.69 1628.59,454.75 1763.34,320 2212.8,320 ; J6.1@2103.78,460 2243.78,320 2715,320 ; J3.1 2715,320 ; D1.A 3300,320 ; J2.1 3398.78,320 3300,320 ; 2715,320 3300,320
  Bottom Layer w30: J2.1 3568.78,150 3710,150 3780,220 3780,2308.11 J1.1 J1.2
pads on no net: U2.J1_7 U2.J1_8 U2.J2_2 U2.J2_3 U2.J2_4 U2.J2_5 U2.J3_3 U2.J3_4 U2.J3_10 U2.J4_10

## Polygon pours and split planes (outlines as drawn)
GND on Top Layer "Top Layer-GND" (solid, pour order 0): 0,3225 3946.22,3225 3946.22,0 0,0 0,3225
GND on Bottom Layer "Bottom Layer-GND" (solid, pour order 2): 0,3225 3946.22,3225 3946.22,0 0,0 0,3225

## Keep-outs
Keep-Out Layer:
  the board outline again, w5

## Other copper
Top Layer:
  region net 5V: 3793.32,1368.32 3845,1420 3905,1420 3905,1395 3835,1325 3625,1325 3625,1368.32
  region net VPOWER: 3480,350 3480,367.52 3380,467.52 3380,525 3345,560 2945.79,560 2520,560 2520,357.8 2512.2,350
  region net buck_out: 3520.13,1709.87 3592.58,1637.42 3592.58,1190 3533.61,1190 3480,1243.61 3480,1525 3425,1580 3170.55,1580 3124.67,1625.88 3124.67,1753.84 3283.66,1753.84 3327.63,1709.87
  region net 5V: 3905,1771.07 3390.9,1771.07 3325,1836.97 3325,1930.35 3905,1930.35
  region net buck_in: 3248.84,987.38 3248.84,627.17 3266.01,610 3417.81,610 3567.81,760 3779.62,971.81 3779.62,1165 3615,1165 3437.38,987.38
  region net VPOWER: 2048.69,350 2048.69,513.08 2048.11,513.66 2161.22,513.66 2324.88,350
  region net VPOWER: 1565.58,350 1565.58,513.08 1565,513.66 1678.11,513.66 1841.77,350
  region net VPOWER: 1565.58,350 1565.58,513.08 1565,513.66 1678.11,513.66 1678.11,451.89 1780,350
  region net VPOWER: 3480,350 3480,219.78 3420.22,160 1755.58,160 1565.58,350
  pour cut-out: 1265,1368.32 1414.97,1368.32 1713.71,1368.32 1265,919.61
  pour cut-out: 2306.23,2969.42 2384.97,2969.42 2384.97,1468.12 2306.23,1468.12
  pour cut-out: 1781.23,2970 1859.97,2970 1859.97,1680 1781.23,1680
Bottom Layer:
  region net 5V: 3479.49,770 3035,320 2677.07,320 3127.07,770
  region net 5V: 3720,1930 3325,1930 3125,1730 3125,600 3311.97,600 3720,1008.03

## Silkscreen, mask and mechanical layers (free items; w line width, h text height)
Top Overlay:
  lines w5: 50,3010 30,3010 30,2752 85,2752 ; 65,2930 50,2930 50,3095 65,3095 ; 640,860 640,775 905,775 ; 790,325 820,325 820,455 790,455 ; 790,530 820,530 820,660 790,660 ; 1015,2895 1015,2790 1095,2790 ; 1160,725 1160,700 1750,700 ; 1321.78,2790 1400,2790 ; 1399.25,2790.75 1399.25,2900 ; 1545,2895 1545,2790 1995,2790 ; 2250,700 2860,700 2860,730 ; 2543.9,2790 3005,2790 ; 3004.25,2790.75 3004.25,2900 ; 3004.25,2825.75 3005,2825 ; 3550,2545 3550,2320 3575,2320 ; 3550,2675 3550,2875 3575,2875 ; 3805,2320 3840,2320 3840,2370 ; 3805,2475 3840,2475 3840,2435 ; 3805,2524 3840,2524 3840,2574 ; 3805,2679 3840,2679 3840,2639 ; 3805,2720 3840,2720 3840,2770 ; 3805,2875 3840,2875 3840,2835
  text "A" at 360,3133.73 h39.37
  text "B" at 566.99,3133.73 h39.37
  text "GND" at 720,3133.73 h39.37
  text "Version 1.1" at 3480,3065 h39.37
  text "3 GND" at 75,3050 h39.37
  text "2 5V" at 75,2980 h39.37
  text "Designed by DPEE Lab" at 3090,2965 h70
  text "1 PWM" at 75,2915 h39.37
  text "-" at 1760,2865 h39.37
  text "+" at 1840,2865 h39.37
  text "+" at 1070,2860 h39.37
  text "-" at 1145,2860 h39.37
  text "-" at 2295,2860 h39.37
  text "B" at 1303.3,2855.91 h39.37
  text "A" at 1223.68,2855 h39.37
  text "B" at 1600,2855 h39.37
  text "A" at 1680,2855 h39.37
  text "+" at 2370,2855 h39.37
  text "-" at 2830,2855 h39.37
  text "+" at 2908.11,2855 h39.37
  text "B" at 2135,2845 h39.37
  text "A" at 2215,2845 h39.37
  text "B" at 2670,2845 h39.37
  text "A" at 2750,2845 h39.37
  text "3" at 210,2825 h39.37
  text "3V3" at 3800,2775 h39.37
  text "MOTOR ENCODER" at 2020,2750 h60
  text "2" at 210,2725 h39.37
  text "1" at 225,2625 h39.37
  text "5V" at 3800,2579 h39.37
  text "GND" at 3565,2549 h39.37 r90
  text "PWR" at 3800,2375 h39.37
  text "M1" at 3050,2326 h39.37
  text "M2" at 3050,2226 h39.37
  text "Motor Curent sense" at 3285,2130 h39.37
  text "M3" at 3050,2128 h39.37
  text "M3EN" at 2631.22,1990 h39.37 r90
  text "M1EN" at 1670.33,1985 h39.37 r90
  text "M2EN" at 2150,1982.75 h39.37 r90
  text "M2DRIV" at 1890.23,1618.61 h60
  text "M1DRIV" at 1410,1613.89 h60
  text "M3DRIV" at 2367.18,1613.61 h60
  text "Status LED" at 35,1460 h80
  text "5V" at 480,1241.23 h39.37 r90
  text "TX" at 581.2,1241.23 h39.37 r90
  text "RX" at 682.39,1241.23 h39.37 r90
  text "GND" at 783.59,1194 h39.37 r90
  text "+" at 340,1105 h39.37
  text "TX" at 700,1080.22 h39.37
  text "-" at 340,1025 h39.37
  text "RX" at 700,982.61 h39.37
  text "SCL" at 340,945 h39.37
  text "GND" at 700,885 h39.37
  text "SDA" at 340,865 h39.37
  text "UART5" at 710,780 h39.37
  text "LCD I2C MUX" at 435,680 h39.37
  text "BoosterPack" at 1778.11,674.74 h80
  text "-" at 340,605 h39.37
  text "sha" at 830,570 h39.37
  text "+" at 340,530 h39.37
  text "SDA" at 340,440 h39.37
  text "SCL" at 340,365 h39.37
  text "sep" at 830,355 h39.37
  text "Nexus Robot / Controller board" at 1425.31,72.04 h150
Bottom Overlay:
  lines w5: 1383.11,695 2578.11,695 ; 1383.11,2845 2558.11,2845 ; 1387.85,275 1387.85,95 1605,95 ; 1476.48,1629.89 1476.48,1524.89 1680.91,1524.89 ; 1547.51,3041.21 1547.51,3151.21 1945,3151.21 ; 1885,1735 1885,1750 1950,1750 ; 1885,1835 1885,1850 1950,1850 ; 1885,1935 1885,1950 1950,1950 ; 2295,1524.76 2522.75,1524.76 ; 2390,100 2617.85,100 2617.85,275 ; 2522,1525.51 2522,1634.76 ; 2600,3151.21 3006.76,3151.21 3006.76,3046.21
  text "MOTOR ENCODER" at 2580,3120 h70
  text "RS485" at 1335,3118.05 h80
  text "05-22" at 3835,3050 h70
  text "+" at 1110,3030 h39.37
  text "-" at 1190,3030 h39.37
  text "B" at 1345.66,3029.9 h39.37
  text "-" at 1800,3030 h39.37
  text "+" at 1880,3030 h39.37
  text "-" at 2335,3030 h39.37
  text "+" at 2410,3030 h39.37
  text "B" at 2710,3030 h39.37
  text "A" at 2791.4,3030 h39.37
  text "-" at 2870,3030 h39.37
  text "+" at 2950,3030 h39.37
  text "A" at 1266.04,3028.99 h39.37
  text "B" at 1645,3024.87 h39.37
  text "A" at 1725,3024.87 h39.37
  text "B" at 2179.59,3025 h39.37
  text "A" at 2258.33,3025 h39.37
  text "SERVO" at 345,2920 h70
  text "3 GND" at 405,2815 h39.37
  text "3V3" at 3920,2775 h39.37
  text "2 5V" at 405,2717.41 h39.37
  text "GND" at 3565,2670 h39.37 r90
  text "1 PWM" at 402.7,2625 h39.37
  text "5V" at 3880,2579.6 h39.37
  text "PWR" at 3920,2374.46 h39.37
  text "+" at 1935,2330 h39.37
  text "+" at 2410,2330 h39.37
  text "+" at 1460,2325 h39.37
  text "M1" at 3115,2325 h39.37
  text "-" at 1935,2230 h39.37
  text "-" at 2410,2230 h39.37
  text "-" at 1460,2225 h39.37
  text "M2" at 3115,2225 h39.37
  text "Nexus Robot / Controller board" at 965,2145 h120
  text "M3" at 3115,2127 h39.37
  text "EN" at 1935,2125 h39.37
  text "EN" at 2410,2125 h39.37
  text "EN" at 1460,2120 h39.37
  text "Designed by DPEE Lab" at 965,2070 h70
  text "CS" at 1935,2025 h39.37
  text "CS" at 2410,2025 h39.37
  text "CS" at 1460,2020 h39.37
  text "Version 1.1" at 965,1995 h70
  text "INA" at 2410,1925 h39.37
  text "INA" at 1460,1920 h39.37
  text "INA" at 1930,1875 h39.37
  text "INB" at 2410,1825 h39.37
  text "INB" at 1460,1820 h39.37
  text "INB" at 1935,1775 h39.37
  text "PWM" at 2410,1725 h39.37
  text "PWM" at 1460,1720 h39.37
  text "PWM" at 1930,1675 h39.37
  text "M3" at 2500,1610 h39.37
  text "M2" at 2025,1603.73 h39.37
  text "M1" at 1555,1603.47 h39.37
  text "MOTOR DRIVER" at 2280.91,1490 h80
  text "IMU" at 275,1215 h80
  text "+" at 180,1105 h39.37
  text "-" at 180,1025 h39.37
  text "SCL" at 195,940 h39.37
  text "SDA" at 195,855 h39.37
  text "LCD" at 287.91,720 h80
  text "+" at 1650,625 h47.24
  text "+" at 2125,625 h47.24
  text "+" at 2595,625 h47.24
  text "-" at 185,605 h39.37
  text "+" at 185,525 h39.37
  text "SDA" at 200,440 h39.37
  text "SCL" at 200,360 h39.37
  text "POWER FOR MOTOR" at 2375,50 h80